# EAGLE board FMBTECH (EAGLE 8.4.0)
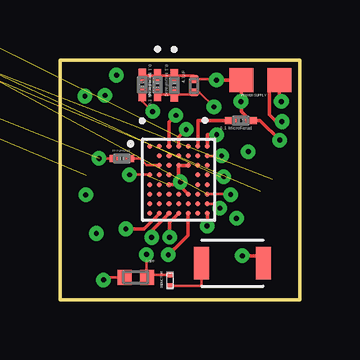
[diagram p0: board, top side]
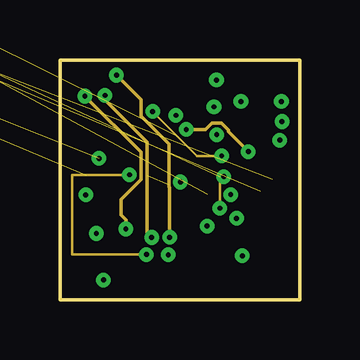
[diagram p1: board, inner layer Route4]
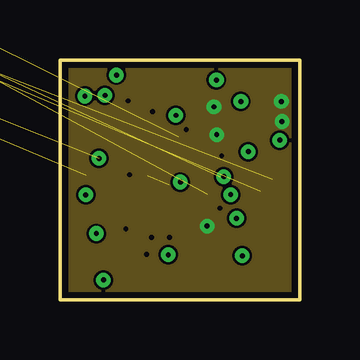
[diagram p2: board, inner layer Route8]
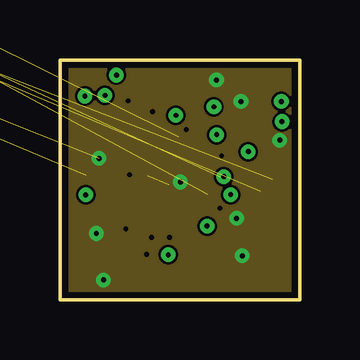
[diagram p3: board, inner layer Route10]
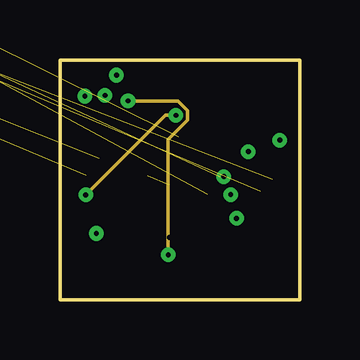
[diagram p4: board, inner layer Route12]
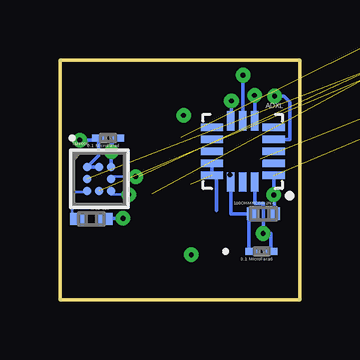
[diagram p5: board, bottom side, seen from below]

Size 10 x 10 mm. Coordinates in mm from the lower left corner, seen from the top.
Outline: 0,0 10,0 10,10 0,10 0,0
Copper layers (((1*4)*8*10)*(12*16)): Top 0.035mm / dielectric 1.5mm / Route4 0.035mm / dielectric 0.15mm / Route8 0.035mm / dielectric 0.15mm / Route10 0.035mm / dielectric 0.15mm / Route12 0.035mm / dielectric 0.15mm / Bottom 0.035mm
Design rules "default *": minimum track width 4mil, minimum drill 8mil, track to track 4mil, track to pad 4mil, pad to pad 4mil, via to via 4mil, smd to smd 2mil, copper to edge 10mil, drill to drill 10mil, minimum pad ring 10mil, minimum via ring 8mil, stop-mask expansion 4mil, vias tented up to drill 0mil, thermal gap 10mil

## Footprints (pad centres in the part's own frame; a part is rotated, then mirrored left to right if it is on the bottom)
TFLGA-16/3.3MMX3.1MM = smd 0.925 x 0.3: 1 -1.288,1; 2 -1.288,0.5; 3 -1.288,0; 4 -1.288,-0.5; 5 -1.288,-1; 9 1.288,-1; 10 1.288,-0.5; 11 1.288,0; 12 1.288,0.5; 13 1.288,1 | smd 0.3 x 0.8: 6 -0.5,-1.275; 7 0,-1.275; 8 0.5,-1.275; 14 0.5,1.275; 15 0,1.275; 16 -0.5,1.275
1 = smd 0.62 x 1.36: 1 0,0; 2 2.58,0
0201 = smd 0.559 x 0.305: 1 -0.394,0; 2 0.394,0
G-033 = smd 0.406 x 0.305: 1 -0.305,0; 2 0.305,0
BGA50N40P7X8_300X320X40 = smd 0.2 x 0.2: A1 -1.2,1.4; A2 -0.8,1.4; A3 -0.4,1.4; A4 0,1.4; A5 0.4,1.4; A6 0.8,1.4; A7 1.2,1.4; B2 -0.8,1; B3 -0.4,1; B4 0,1; B5 0.4,1; B6 0.8,1; B7 1.2,1; C2 -0.8,0.6; C3 -0.4,0.6; C4 0,0.6; C5 0.4,0.6; C6 0.8,0.6; C7 1.2,0.6; D1 -1.2,0.2; D2 -0.8,0.2; D3 -0.4,0.2; D6 0.8,0.2; D7 1.2,0.2; E1 -1.2,-0.2; E2 -0.8,-0.2; E3 -0.4,-0.2; E6 0.8,-0.2; E7 1.2,-0.2; F1 -1.2,-0.6; F2 -0.8,-0.6; F3 -0.4,-0.6; F4 0,-0.6; F5 0.4,-0.6; F6 0.8,-0.6; F7 1.2,-0.6; G1 -1.2,-1; G2 -0.8,-1; G3 -0.4,-1; G4 0,-1; G5 0.4,-1; G6 0.8,-1; G7 1.2,-1; H1 -1.2,-1.4; H2 -0.8,-1.4; H3 -0.4,-1.4; H4 0,-1.4; H5 0.4,-1.4; H6 0.8,-1.4; H7 1.2,-1.4
RC0402N = smd 0.66 x 0.508: 1 -0.559,0; 2 0.559,0
RES = smd 0.457 x 0.508: 1 -0.457,0; 2 0.457,0
YZF8 = smd 0.35 x 0.35: A1 -0.5,0.5; A2 0,0.5; A3 0.5,0.5; B1 -0.5,0; B3 0.5,0; C1 -0.5,-0.5; C2 0,-0.5; C3 0.5,-0.5
CAP = smd 0.34 x 0.36: 1 -0.28,0; 2 0.28,0
CAP' = smd 0.58 x 0.62: 1 -0.47,0; 2 0.47,0
1' = smd 0.23 x 0.3: 1 -0.235,0; 2 0.235,0
SUPPLY = smd 1 x 1: P$1 0,0; P$2 1.6,0

## Placement (x,y rotation side)
ADXL  ADXL362  [TFLGA-16/3.3MMX3.1MM]  2.37,6.18 180 bottom
ANT1  ANTENNASMD  [1]  5.91,1.52 0 top
C1  02016D104KAT2A  [0201]  3.43,8.96 90 top
C2  02016D104KAT2A  [0201]  7.55,7.47 0 top
C3  GRM0335C1E101JA01D  [G-033]  2.58,5.88 180 top
C4  02016D104KAT2A  [0201]  7.99,6.74 0 bottom
C5  02016D104KAT2A  [0201]  -27.94,13.97 0 top  (outside the outline)
C6  02016D104KAT2A  [0201]  4.77,8.94 270 top
C7  02016D104KAT2A  [0201]  4.07,8.95 270 top
C8  02016D104KAT2A  [0201]  1.59,2.01 0 bottom
C9  02016D104KAT2A  [0201]  -25.4,16.51 0 top  (outside the outline)
NRF  NRF52832-CIAA-R  [BGA50N40P7X8_300X320X40]  4.95,5 0 top
R1  RC0402JR-0710KL  [RC0402N]  -20.32,19.05 0 top  (outside the outline)
R2  RC0402JR-0710KL  [RC0402N]  -22.86,19.05 0 top  (outside the outline)
R3  RC0402JR-0710KL  [RC0402N]  -25.4,19.05 0 top  (outside the outline)
R4  RC0402JR-0710KL  [RC0402N]  -27.94,19.05 0 top  (outside the outline)
R5  RC0402JR-0710KL  [RC0402N]  8.69,3.37 180 bottom
R6  100OHMRC0402N-L  [RES]  1.51,3.58 180 bottom
U1  TMP006BIYZFT  [YZF8]  8.36,5.04 0 bottom
U$1  4.7µF  [CAP]  5.6,8.92 270 top
U$2  0.8PF  [CAP']  3.16,0.93 180 top
U$3  INDUCTOR  [1']  4.59,0.8 270 top
U$4  SUPPLY  [SUPPLY]  7.56,9.16 0 top

## Library data of the parts
ADXL = ADXL362; AVAILABILITY: Good; DESCRIPTION: Accelerometer Triple ±2/±4/±8g 1.6V to 3.6V 16-Pin LGA T/R; MF: Analog Devices; MP: ADXL362BCCZ-RL7; PACKAGE: LGA-16 Analog Devices; PRICE: 6.52 USD
ANT1 = antenna; AVAILABILITY: Good; DESCRIPTION: Bluetooth/WLAN/WiFi Ceramic Chip Antenna 3-Pin SMD; MF: Pulse; MP: W3008; PACKAGE: None; PRICE: 0.93 USD
C1 C2 C4-C9 = cap_1microfarad; MANUFACTURER_PART_NUMBER: 02016D104KAT2A; VENDOR: AVX Corporation
C3 = cap_100picofarad; MANUFACTURER_PART_NUMBER: GRM0335C1E101JA01D; VENDOR: Murata
NRF = NRF52832-CIAA-R; AVAILABILITY: Good; DESCRIPTION: Multi Protocal Bluetooth Smart ANT 2.4GHz RF SoC (WL-CSP); MF: Nordic Semiconductor; MP: NRF52832-CIAA-R; PACKAGE: XFBGA-50 Nordic Semiconductor; PRICE: 3.94 USD
R1-R5 = res_10kohm; MANUFACTURER_PART_NUMBER: RC0402JR0710KL; VENDOR: Yageo
R6 = 100ohm; MANUFACTURER_PART_NUMBER: RC0402FR07100RL; VENDOR: Yageo
U1 = tmp006b; MANUFACTURER_PART_NUMBER: TMP006BIYZFT; VENDOR: Texas Instruments
U$1 = 4p7microfarad
U$2 = 0p8picofarad
U$3 = inductor
U$4 = supply

## Nets
ADXL_POWER: ADXL.1 C9.1 NRF.A3 R6.1
ANT: NRF.D1 U$2.1 U$3.1
CS: ADXL.8 NRF.H5
DCC: NRF.B6
DEC2: NRF.A2
GND: ADXL.12 ADXL.13 ADXL.16 ANT1.2 C1.2 C2.2 C3.2 C4.1 C5.1 C6.1 C7.1 C8.2 C9.2 NRF.C4 NRF.C5 NRF.E3 NRF.F5 R4.1 R5.1 U1.A1 U1.A2 U$1.1 U$2.2 U$4.P$1
MISO: ADXL.7 NRF.H4
MOSI: ADXL.6 NRF.H3
N$1: R5.2 U1.C1
N$3: R4.2 U1.B1
N$4: R3.1 U1.C2
N$5: ANT1.1 U$3.2
N$6: C2.1 NRF.A6
N$8: C1.1 NRF.B7
N$9: C3.1 NRF.C2
N$10: ADXL.14 C8.1 R6.2
RESET: NRF.H1
SCL: NRF.G7 R2.1 U1.B3
SCLK: ADXL.4 NRF.H2
SDA: NRF.F7 R1.1 U1.C3
STATUSLED: NRF.H6
SWDCLK: NRF.F1
SWDIO: NRF.G1
TMP_POWER: C4.2 C5.2 NRF.A4 R1.2 R2.2 R3.2 U1.A3
VCC: C6.2 C7.2 NRF.A7 NRF.H7 U$1.2 U$4.P$2
VSS_PA: NRF.D2

## Tracks (layer width: path | path; a pad name or v marks a point on that pad's centre or on a via)
ADXL_POWER  (via drill 0.2)  (1 unrouted)
  Top 0.152: NRF.A3 4.55,7.4 v4.84,7.69
  Route12 0.152: v4.84,7.69 4.4,7.69 v1.08,4.37
  Bottom 0.152: ADXL.1 v1.08,4.37 1.05,4.37 R6.1
ANT  (via drill 0.2 layers 1-4)
  Top 0.102: U$3.1 3.63,1.03 U$2.1 3.61,0.93 v3.61,1.88 | v2.9,5.21 NRF.D1
  Route4 0.102: v3.61,1.88 0.5,1.88 0.5,5.2 v2.9,5.2 v2.9,5.21
CS  (via drill 0.2, 0.2 layers 12-16)
  Top 0.152: v4.52,1.87 4.77,2.12 4.78,2.12 5.34,2.68 NRF.H5
  Route12 0.152: v4.52,1.87 4.52,6.69 5.32,7.49 5.32,7.89 4.92,8.29 v2.85,8.29
  Bottom 0.152: v2.85,8.29 2.85,7.46 ADXL.8
GND  (via drill 0.2, 0.2 layers 1-10)  (4 unrouted)
  Top 0.102: 5.7,9.2 U$1.1 | 5.7,9.2 6.49,9.2 v6.53,9.16 | 5.7,9.2 5.57,9.34 C6.1 4.76,9.35 4.1,9.35 | 4.1,9.35 C7.1 | C1.2 4.09,9.35 4.1,9.35 | U$2.2 1.82,0.93 v1.82,0.82 | C3.2 v1.63,5.89
  Top 0.152: NRF.F5 4.95,4.8 | 4.95,4.8 NRF.E3 | 4.95,4.8 NRF.C4 NRF.C5 | 4.95,4.8 5.03,4.88 v5.03,4.91 | v6.53,9.16 U$4.P$1 7.56,8.33 | 7.56,8.33 v7.55,8.26 | ANT1.2 8.18,1.83 v7.61,1.83 | 7.56,8.33 7.56,7.85 C2.2 8.35,7.47 v9.17,6.65
  Route10 0.152: v5.03,4.91 | v5.03,4.91 | v6.53,9.16 6.53,9.14 | v7.55,8.26 7.55,8.32
  Bottom 0.152: U1.A2 U1.A1 8.38,6.01 C4.1 8.47,6.65 v9.17,6.65 | R5.1 8.11,3.39 v7.37,3.39 | ADXL.12 ADXL.13 3.47,5.18 3.47,3.72 | ADXL.16 1.87,4.02 1.52,4.02 | 1.51,4.02 1.52,4.02 | 1.52,4.02 v1.52,2.76 1.2,2.76 C8.2
  pour Route10 (no thermals): 0,0 10,0 10,10 0,10
MISO  (via drill 0.2, 0.2 layers 1-4)
  Top 0.152: NRF.H4 4.58,3.23 v4.58,2.6
  Route4 0.152: v4.58,2.6 4.58,4.67 4.54,4.71 4.54,6.49 3.39,7.65 3.39,8.34 v2.36,9.37
  Bottom 0.152: v2.36,9.37 2.36,8.72 ADXL.7
MOSI  (via drill 0.2, 0.2 layers 1-4)
  Top 0.152: v3.83,2.59 3.83,2.87 NRF.H3
  Route4 0.152: v1.88,8.52 1.88,8.33 3.64,6.58 3.64,2.78 v3.83,2.59
  Bottom 0.152: ADXL.6 v1.87,8.51 v1.88,8.52
N$1
  Bottom 0.102: U1.C1 8.9,4.5 9.5,4.5 9.5,3.62 R5.2
N$3  (1 unrouted)
N$4  (1 unrouted)
N$5
  Top 0.102: 5.91,1.58 ANT1.1 | 5.91,1.58 5.91,2.1 | U$3.2 5.91,0.56 5.91,1.58
N$6
  Top 0.152: NRF.A6 5.75,7.47 C2.1
N$8  (via drill 0.2 layers 1-4)
  Top 0.102: C1.1 3.43,8.29 v3.87,7.85 | v6.75,6 NRF.B7
  Route4 0.102: v3.87,7.85 5.72,6 v6.75,6
N$9
  Top 0.102: C3.1 3.35,5.88 3.62,5.61 NRF.C2
N$10
  Bottom 0.152: 2.11,3.58 R6.2 | 2.11,3.58 2.87,3.58 ADXL.14 | C8.1 2.11,2.01 2.11,3.58
SCL  (via drill 0.2, 0.2 layers 1-4)  (1 unrouted)
  Top 0.102: NRF.G7 6.67,4 v6.67,3.81
  Route4 0.102: v6.67,3.81 6.67,5.13 v6.84,5.13
  Bottom 0.102: v6.84,5.13 7.86,5.13 U1.B3
SCLK  (via drill 0.2, 0.2 layers 1-4)
  Top 0.152: NRF.H2 3.5,2.95 v2.75,2.95
  Route4 0.152: v2.75,2.95 2.75,3.33 2.55,3.53 2.55,4.17 3.38,5.01 3.38,6.15 v1.04,8.49
  Bottom 0.152: v1.04,8.49 0.66,8.49 0.41,8.24 0.41,6.68 1.08,6.68 ADXL.4
SDA  (via drill 0.2)  (1 unrouted)
  Top 0.102: NRF.F7 7.13,4.4 v7.13,4.38
  Bottom 0.102: v7.13,4.38 7.86,4.38 U1.C3
TMP_POWER  (via drill 0.2, 0.2 layers 1-4)  (4 unrouted)
  Top 0.152: NRF.A4 4.95,6.78 v5.27,7.1
  Route4 0.152: v5.27,7.1 6.08,7.1 6.34,7.36 6.74,7.36 7.02,7.08 7.02,7.01 v7.86,6.17
  Bottom 0.152: C4.2 7.86,6.48 v7.86,6.17 U1.A3
VCC  (via drill 0.2 layers 1-10)
  Top 0.102: v6.43,8.04 5.82,8.64 U$1.2 5.5,8.55 4.8,8.55 | 4.8,8.55 C6.2 | C7.2 4.79,8.56 4.8,8.55
  Top 0.152: v9.26,7.43 9.03,7.43 8.73,7.73 8.73,8.72 U$4.P$2 9.16,8.34 v9.24,8.27 | NRF.H7 6.15,3.07 v6.14,3.07 | NRF.A7 6.15,6.88 v6.54,6.88
  Route8 0.152: v9.26,7.43 9.27,7.43 9.27,7.44 | v6.14,3.07 6.14,3.05 | 6.14,3.05 6.13,3.05 | 6.14,3.05 6.15,3.05 | 6.18,3.05 6.15,3.05 | 6.15,3.05 6.15,3.02
  pour Route8 (no thermals): 0,0 10,0 10,10 0,10